# EAGLE board T32 ref (EAGLE 9.6.2)

Size 160 x 100 mm. Coordinates in mm from the lower left corner, seen from the top.
Outline: 0,0 160,0 160,100 0,100 0,0
Copper layers (1*16): Top 0.035mm / dielectric 1.5mm / Bottom 0.035mm
Design rules "default": minimum track width 6mil, minimum drill 0.35mm, track to track 6mil, track to pad 6mil, pad to pad 6mil, via to via 6mil, smd to smd 6mil, copper to edge 40mil, drill to drill 6mil, minimum pad ring 10mil, minimum via ring 8mil, stop-mask expansion 4mil, vias tented up to drill 0mil, thermal gap 10mil

## Footprints (pad centres in the part's own frame; a part is rotated, then mirrored left to right if it is on the bottom)
1X02 = drill 1.016 pad 1.88: 1 0,0; 2 2.54,0
1206 = smd 1.6 x 1.8: 1 -1.4,0; 2 1.4,0
BAT_3000 = smd 3.96 x 3.96: N 0,0.69 | smd 3.18 x 3.18: P 7.87,0.69; P1 -7.87,0.69
0603 = smd 1.1 x 1: 1 -0.85,0; 2 0.85,0
C0805 = smd 1.397 x 1.016: 1 0,1.016; 2 0,-1.016
C0603 = smd 0.889 x 0.889: 1 0,0.762; 2 0,-0.762
0402 = smd 0.85 x 0.9: 1 -0.58,0; 2 0.58,0
0805 = smd 1.3 x 1.5: 1 -0.95,0; 2 0.95,0
1210 = smd 1.27 x 2.06: 1 -1.755,0; 2 1.755,0
TE_1-2295018-2 = smd 0.3 x 0.8: A1 -2.75,4.63; A2 -2.25,4.63; A3 -1.75,4.63; A4 -1.25,4.63; A5 -0.75,4.63; A6 -0.25,4.63; A7 0.25,4.63; A8 0.75,4.63; A9 1.25,4.63; A10 1.75,4.63; A11 2.25,4.63; A12 2.75,4.63; B1 3,3.43; B2 2.5,3.43; B3 2,3.43; B4 1.5,3.43; B5 1,3.43; B6 0.5,3.43; B7 -0.5,3.43; B8 -1,3.43; B9 -1.5,3.43; B10 -2,3.43; B11 -2.5,3.43; B12 -3,3.43 | drill 0.5 pad 1.1 long: S1 -5.97,0; S2 5.97,0 | drill 0.5 pad 1.1: S3 -4.55,4.22; S4 4.55,4.22
1X07 = drill 1.016 pad 1.88: 1 0,0; 2 2.54,0; 3 5.08,0; 4 7.62,0; 5 10.16,0; 6 12.7,0; 7 15.24,0
LQFP64-05 = smd 1.2 x 0.25: 1 -5.915,3.759; 2 -5.915,3.251; 3 -5.915,2.743; 4 -5.915,2.261; 5 -5.915,1.753; 6 -5.915,1.245; 7 -5.915,0.762; 8 -5.915,0.254; 9 -5.915,-0.254; 10 -5.915,-0.762; 11 -5.915,-1.245; 12 -5.915,-1.753; 13 -5.915,-2.261; 14 -5.915,-2.743; 15 -5.915,-3.251; 16 -5.915,-3.759; 33 5.915,-3.759; 34 5.915,-3.251; 35 5.915,-2.743; 36 5.915,-2.261; 37 5.915,-1.753; 38 5.915,-1.245; 39 5.915,-0.762; 40 5.915,-0.254; 41 5.915,0.254; 42 5.915,0.762; 43 5.915,1.245; 44 5.915,1.753; 45 5.915,2.261; 46 5.915,2.743; 47 5.915,3.251; 48 5.915,3.759 | smd 0.25 x 1.2: 17 -3.759,-5.915; 18 -3.251,-5.915; 19 -2.743,-5.915; 20 -2.261,-5.915; 21 -1.753,-5.915; 22 -1.245,-5.915; 23 -0.762,-5.915; 24 -0.254,-5.915; 25 0.254,-5.915; 26 0.762,-5.915; 27 1.245,-5.915; 28 1.753,-5.915; 29 2.261,-5.915; 30 2.743,-5.915; 31 3.251,-5.915; 32 3.759,-5.915; 49 3.759,5.915; 50 3.251,5.915; 51 2.743,5.915; 52 2.261,5.915; 53 1.753,5.915; 54 1.245,5.915; 55 0.762,5.915; 56 0.254,5.915; 57 -0.254,5.915; 58 -0.762,5.915; 59 -1.245,5.915; 60 -1.753,5.915; 61 -2.261,5.915; 62 -2.743,5.915; 63 -3.251,5.915; 64 -3.759,5.915
INDC1608X95N = smd 0.9 x 0.97: 1 -0.785,0; 2 0.785,0
1X04 = drill 1.016 pad 1.88: 1 0,0; 2 2.54,0; 3 5.08,0; 4 7.62,0
1X03 = drill 1.016 pad 1.88: 1 0,0; 2 2.54,0; 3 5.08,0
LED-0805 = smd 0.889 x 1.27: + -0.889,0; - 0.889,0
F0805 = smd 1.397 x 1.016: 1 0,0.889; 2 0,-0.889
L0603 = smd 0.889 x 0.889: 1 -0.762,0; 2 0.762,0
R0603 = smd 0.889 x 0.889: 1 0,0.762; 2 0,-0.762
SOT-23 = smd 1.016 x 1.143: 1 -0.889,-1.016; 2 0.889,-1.016; 3 0,1.016
R0402 = smd 0.5 x 0.5: 1 0,0.463; 2 0,-0.463
MICROBUILDER_LGA8_8X6 = smd 1.2 x 0.6: 1 -3.8,1.905; 2 -3.8,0.635; 3 -3.8,-0.635; 4 -3.8,-1.905; 5 3.8,-1.905; 6 3.8,-0.635; 7 3.8,0.635; 8 3.8,1.905
SDE06A_TEX-M = smd 0.914 x 0.356: 1 -1.499,0.95; 2 -1.499,0; 3 -1.499,-0.95; 4 1.499,-0.95; 5 1.499,0; 6 1.499,0.95 | smd 1.6 x 2.1: 7 0,0
MICROBUILDER_BNO080 = smd 0.25 x 0.675: 1 -2.25,1.562; 6 -2.25,-1.562; 7 -1.75,-1.562; 8 -1.25,-1.562; 9 -0.75,-1.562; 10 -0.25,-1.562; 11 0.25,-1.562; 12 0.75,-1.562; 13 1.25,-1.562; 14 1.75,-1.562; 15 2.25,-1.562; 20 2.25,1.562; 21 1.75,1.562; 22 1.25,1.562; 23 0.75,1.562; 24 0.25,1.562; 25 -0.25,1.562; 26 -0.75,1.562; 27 -1.25,1.562; 28 -1.75,1.562 | smd 0.575 x 0.25: 2 -2.312,0.75; 3 -2.312,0.25; 4 -2.312,-0.25; 5 -2.312,-0.75; 16 2.312,-0.75; 17 2.312,-0.25; 18 2.312,0.25; 19 2.312,0.75
SOIC127P599X175-8N = smd 1.97 x 0.6: 1 -2.47,1.905; 2 -2.47,0.635; 3 -2.47,-0.635; 4 -2.47,-1.905; 5 2.47,-1.905; 6 2.47,-0.635; 7 2.47,0.635; 8 2.47,1.905
WSON8-6X5MM = smd 0.5 x 1.4: 1 -1.905,-3; 2 -0.635,-3; 3 0.635,-3; 4 1.905,-3; 5 1.905,3; 6 0.635,3; 7 -0.635,3; 8 -1.905,3 | smd 4.3 x 3.4: EP 0,0
QFN50P300X300X65-17N = smd 0.65 x 0.3: 1 -1.55,0.75; 2 -1.55,0.25; 3 -1.55,-0.25; 4 -1.55,-0.75; 9 1.55,-0.75; 10 1.55,-0.25; 11 1.55,0.25; 12 1.55,0.75 | smd 0.3 x 0.65: 5 -0.75,-1.55; 6 -0.25,-1.55; 7 0.25,-1.55; 8 0.75,-1.55; 13 0.75,1.55; 14 0.25,1.55; 15 -0.25,1.55; 16 -0.75,1.55 | smd 2 x 2: 17 0,0
21-0136I_T1633-5_MXM-M = smd 0.906 x 0.249: 1 -1.503,0.75; 2 -1.503,0.25; 3 -1.503,-0.25; 4 -1.503,-0.75; 9 1.503,-0.75; 10 1.503,-0.25; 11 1.503,0.25; 12 1.503,0.75 | smd 0.249 x 0.906: 5 -0.75,-1.503; 6 -0.25,-1.503; 7 0.25,-1.503; 8 0.75,-1.503; 13 0.75,1.503; 14 0.25,1.503; 15 -0.25,1.503; 16 -0.75,1.503 | smd 1.25 x 1.25: 17 0,0
MICROBUILDER_QFN24_3MM = smd 0.55 x 0.2: 1 -1.5,1; 2 -1.5,0.6; 3 -1.5,0.2; 4 -1.5,-0.2; 5 -1.5,-0.6; 6 -1.5,-1; 13 1.5,-1; 14 1.5,-0.6; 15 1.5,-0.2; 16 1.5,0.2; 17 1.5,0.6; 18 1.5,1 | smd 0.2 x 0.55: 7 -1,-1.5; 8 -0.6,-1.5; 9 -0.2,-1.5; 10 0.2,-1.5; 11 0.6,-1.5; 12 1,-1.5; 19 1,1.5; 20 0.6,1.5; 21 0.2,1.5; 22 -0.2,1.5; 23 -0.6,1.5; 24 -1,1.5 | smd 1.54 x 1.54: THERMAL 0,0
MICROBUILDER_BMP388 = smd 0.25 x 0.275: 1 0.25,0.75; 2 -0.25,0.75; 6 -0.25,-0.75; 7 0.25,-0.75 | smd 0.275 x 0.25: 3 -0.762,0.5; 4 -0.762,0; 5 -0.762,-0.5; 8 0.762,-0.5; 9 0.762,0; 10 0.762,0.5
CRYSTAL-SMD-3.2X1.5MM = smd 1 x 1.8: P$1 -1.25,0; P$2 1.25,0
X2-SMD-5.0X3.2X1.3MM = smd 1.778 x 2.032: 1 -2.159,0; 2 2.159,0

## Placement (x,y rotation side)
2_CELL_LIPO_BATTERY  [1X02]  -60.96,46.99 0 top  (outside the outline)
120  [1206]  -21.59,43.18 0 top  (outside the outline)
BT1  CR1216  [BAT_3000]  -24.13,8.89 0 top  (outside the outline)
C1  0.1uF  [0603]  -64.77,57.15 0 top  (outside the outline)
C2  2.2uF  [0603]  -6.35,49.53 0 top  (outside the outline)
C3  2.2uF  [C0805]  -15.24,36.83 0 top  (outside the outline)
C4  0.1uF  [C0603]  -25.4,57.15 0 top  (outside the outline)
C5  0.1uF  [C0603]  -30.48,57.15 0 top  (outside the outline)
C6  2.2uF  [C0805]  -21.59,36.83 0 top  (outside the outline)
C7  0.1uF  [C0603]  -35.56,57.15 0 top  (outside the outline)
C8  0.1uF  [C0603]  -40.64,57.15 0 top  (outside the outline)
C9  0.1uF  [C0603]  -45.72,57.15 0 top  (outside the outline)
C10  22pF  [C0603]  -50.8,57.15 0 top  (outside the outline)
C11  22pF  [C0603]  -55.88,57.15 0 top  (outside the outline)
C12  0.1uF  [C0603]  -60.96,57.15 0 top  (outside the outline)
C13  0.1uF  [0402]  -26.67,64.77 0 top  (outside the outline)
C14  0.1uF  [0402]  -30.48,64.77 0 top  (outside the outline)
C15  22pF  [0603]  -19.05,60.96 0 top  (outside the outline)
C16  22pF  [0603]  -22.86,60.96 0 top  (outside the outline)
C17  0.1uF  [0402]  -34.29,64.77 0 top  (outside the outline)
C18  47uF  [0805]  -60.96,64.77 0 top  (outside the outline)
C19  0.1uF  [0603]  -26.67,60.96 0 top  (outside the outline)
C20  0.1uF  [0603]  -30.48,60.96 0 top  (outside the outline)
C21  0.1uF  [0603]  -34.29,60.96 0 top  (outside the outline)
C22  0.1uF  [0603]  -38.1,60.96 0 top  (outside the outline)
C23  0.1uF  [0603]  -41.91,60.96 0 top  (outside the outline)
C24  0.1uF  [0603]  -45.72,60.96 0 top  (outside the outline)
C25  0.1uF  [0603]  -49.53,60.96 0 top  (outside the outline)
C26  0.1uF  [0603]  -53.34,60.96 0 top  (outside the outline)
C27  22UF-1210-16V-20%  [1210]  -38.1,30.48 0 top  (outside the outline)
C28  22UF-1210-16V-20%  [1210]  -48.26,30.48 0 top  (outside the outline)
C29  2.2uF  [0603]  -57.15,60.96 0 top  (outside the outline)
C30  2.2uF  [0603]  -60.96,60.96 0 top  (outside the outline)
C31  2.2uF  [0603]  -64.77,60.96 0 top  (outside the outline)
J2  1-2295018-2  [TE_1-2295018-2]  38.1,8.89 0 top
J3  [1X07]  -39.37,46.99 0 top  (outside the outline)
K1  MK20DX256VLH7  [LQFP64-05]  40.64,39.37 0 top
L1  MLF1608E6R8KTD25  [INDC1608X95N]  -63.5,30.48 0 top  (outside the outline)
NRF24L01_A  [1X04]  -50.8,46.99 0 top  (outside the outline)
NRF24L01_B  [1X03]  11.43,62.23 0 top
P1  [LED-0805]  -60.96,52.07 0 top  (outside the outline)
R1  FUSE  [F0805]  -15.24,43.18 0 top  (outside the outline)
R2  [L0603]  -38.1,64.77 0 top  (outside the outline)
R3  470R  [R0603]  -26.67,43.18 0 top  (outside the outline)
R4  [L0603]  -43.18,64.77 0 top  (outside the outline)
R5  33R  [R0603]  -31.75,43.18 0 top  (outside the outline)
R6  33R  [R0603]  -36.83,43.18 0 top  (outside the outline)
R7  [SOT-23]  -30.48,30.48 0 top  (outside the outline)
R8  470R  [R0603]  -41.91,43.18 0 top  (outside the outline)
R9  4.7k  [0603]  -15.24,64.77 0 top  (outside the outline)
R10  4.7k  [0603]  -19.05,64.77 0 top  (outside the outline)
R11  4.7K  [R0402]  -15.24,57.15 0 top  (outside the outline)
R12  4.7K  [R0402]  -20.32,57.15 0 top  (outside the outline)
R13  10k  [0603]  48.26,29.21 0 top
R14  1.5K  [R0603]  -46.99,43.18 0 top  (outside the outline)
R15  1.5K  [R0603]  -52.07,43.18 0 top  (outside the outline)
SPI_SD_CARD  [MICROBUILDER_LGA8_8X6]  -55.88,21.59 0 top  (outside the outline)
U1  LP38691QSD-3.3/NOPBSDE06A_TEX-M  [SDE06A_TEX-M]  -54.61,52.07 0 top  (outside the outline)
U2  [MICROBUILDER_BNO080]  -24.13,30.48 0 top  (outside the outline)
U3  SN65HVD230  [SOIC127P599X175-8N]  43.18,24.13 0 top
U4  W25Q32FV  [WSON8-6X5MM]  -45.72,21.59 0 top  (outside the outline)
U5  MKL02Z32VFG4  [QFN50P300X300X65-17N]  -39.37,22.86 0 top  (outside the outline)
U6  MAX17632AATE+T21-0136I_T1633-5_MXM-M  [21-0136I_T1633-5_MXM-M]  -62.23,38.1 0 top  (outside the outline)
U$2  MICROBUILDER_ICM-20649QFN3MM  [MICROBUILDER_QFN24_3MM]  38.1,66.04 0 top
U$3  MICROBUILDER_BMP388  [MICROBUILDER_BMP388]  13.97,73.66 0 top
U$8  10K  [R0402]  -48.26,64.77 0 top  (outside the outline)
U$9  10K  [R0402]  -53.34,64.77 0 top  (outside the outline)
U$10  10K  [R0402]  34.29,60.96 0 top
Y1  32.768kHz  [CRYSTAL-SMD-3.2X1.5MM]  -15.24,48.26 0 top  (outside the outline)
Y2  32.768kHz  [CRYSTAL-SMD-3.2X1.5MM]  -20.32,48.26 0 top  (outside the outline)
Y3  16MHZ  [X2-SMD-5.0X3.2X1.3MM]  -16.51,31.75 0 top  (outside the outline)

## Library data of the parts
2_CELL_LIPO_BATTERY J3 NRF24L01_B = SparkFun-Connectors
120 = SparkFun-Resistors
BT1 = Battery_Holder; CATEGORY: Battery-Holder; CELL_DIAMETER: 12mm; DESCRIPTION: Battery Retainer Coin, 12.0mm 1 Cell SMD (SMT) Tab; MANUFACTURER: Keystone Electronics; MPN: 3000; PART_STATUS: ACTIVE; ROHS_COMPLIANT: COMPLIANT; SERIES: -; SUB_CATEGORY: Holder; TYPE: Coin Cell
C1 C26 = SparkFun-Capacitors; PROD_ID: CAP-00810
C2 C29-C31 = SparkFun-Capacitors; PROD_ID: CAP-07888
C3 C6 = t32_ref; DESC: 2.2uF / 25 VDC / X7R; MF: Taiyo Yuden; MPN: TMK212B7225KG-TR; OC_MOUSER: 963-TMK212B7225KG-TR; PACKAGE: 0805; TYPE: Capacitor
C4 C5 C7-C9 C12 = t32_ref; DESC: 0.1uF / 16VDC / X7R; MF: Murata Electronics; MPN: GRM188R71C104KA01D; OC_MOUSER: 81-GRM39X104K16; PACKAGE: 0603; TYPE: Capacitor
C10 C11 = t32_ref; DESC: 22pF / 50VDC / C0G (NP0); MF: Vishay / Vitramon; MPN: VJ0603A220JXACW1BC; OC_MOUSER: 77-VJ0603A220JXACBC; PACKAGE: 0603; TYPE: Capacitor
C13 C14 C17 = SparkFun-Capacitors; PROD_ID: CAP-12416
C15 C16 = SparkFun-Capacitors; PROD_ID: CAP-07876
C18 = microbuilder
C19-C25 = SparkFun-Capacitors; PROD_ID: CAP-08390
C27 C28 = SparkFun-Capacitors
J2 = 1-2295018-2; AVAILABILITY: In Stock; DESCRIPTION: USB-C (USB TYPE-C) USB 3.2 Gen 2 (USB 3.1 Gen 2, Superspeed + (USB 3.1)) Receptacle Connector 24 Position Board Cutout, Surface Mount, Right Angle; Through Hole; MF: TE Connectivity AMP Connectors; MP: 1-2295018-2; PACKAGE: None; PRICE: None; PURCHASE-URL: https://pricing.snapeda.com/search/part/1-2295018-2/?ref=eda
K1 = t32_ref; DESC: MK20DX256VLH7; MF: NXP; MPN: MK20DX256VLH7; OC_MOUSER: 841-MK20DX256VLH7; PACKAGE: LQFP-64; TYPE: Microcontroller
L1 = MLF1608E6R8KTD25; AVAILABILITY: In Stock; DESCRIPTION: Fixed Ind 6.8uh 15ma 1.3 Ohm Smd; MF: TDK; MP: MLF1608E6R8KTD25; PACKAGE: 0603 TDK; PRICE: None; PURCHASE-URL: https://pricing.snapeda.com/search/part/MLF1608E6R8KTD25/?ref=eda
NRF24L01_A = SparkFun-Connectors; PROD_ID: CONN-09696
P1 = t32_ref; DESC: orange; MF: ROHM Semiconductor; MPN: SML-211DTT86; OC_MOUSER: 755-SML-211DTT86; PACKAGE: 0805; TYPE: LED
R1 = t32_ref; DESC: 6V / 0.5A; MF: Bel Fuse; MPN: 0ZCK0050FF2E; OC_MOUSER: 530-0ZCK0050FF2E; PACKAGE: 0805; TYPE: PPTC
R2 R4 = t32_ref; DESC: 600R / 100MHz; MF: Murata Electronics; MPN: BLM18AG601SN1D; OC_MOUSER: 81-BLM11A601S; PACKAGE: 0603; TYPE: Ferrite
R3 R8 = t32_ref; DESC: 470R / 1 % / 0.1 W; MF: Vishay; MPN: CRCW0603470RFKEA; OC_MOUSER: 71-CRCW0603-470-E3; PACKAGE: 0603; TYPE: Resistor
R5 R6 = t32_ref; DESC: 33R / 1% / 0.25 W; MF: Panasonic; MPN: ERJ-PA3F33R0V; OC_MOUSER: 667-ERJ-PA3F33R0V; PACKAGE: 0603; TYPE: Resistor
R7 = t32_ref; DESC: Dual Schottky, common cat; MF: NXP Semiconductors; MPN: BAT54C,215; OC_MOUSER: 771-BAT54C-T/R; PACKAGE: SOT-23; TYPE: Diode
R9 R10 = SparkFun-Resistors; PROD_ID: RES-07857
R11 R12 = OPL_Resistor; MPN: RC0402JR-074K7L
R13 = SparkFun-Resistors; PROD_ID: RES-00824
R14 R15 = OPL_Resistor; MPN: RC0603FR-071K5L
SPI_SD_CARD = Adafruit SPI Flash SD Card
U1 = BLTFootprints; COPYRIGHT: Copyright (C) 2021 Ultra Librarian. All rights reserved.; MANUFACTURER_PART_NUMBER: LP38691QSD-3.3/NOPB; MFR_NAME: Texas Instruments
U2 = Adafruit_BNO08x
U3 = SN65HVD230; AVAILABILITY: In Stock; DESCRIPTION: 1/1 Transceiver Half CANbus 8-SOIC; MF: Texas Instruments; MP: SN65HVD230; PACKAGE: SOIC-8 Texas Instruments; PRICE: None; PURCHASE-URL: https://pricing.snapeda.com/search/part/SN65HVD230/?ref=eda
U4 = SparkFun-IC-Memory; PROD_ID: NA-XXXXX
U5 = MKL02Z32VFG4; AVAILABILITY: In Stock; DESCRIPTION: MCU 32-bit ARM Cortex M0+ RISC 32KB Flash 3.3V Automotive 16-Pin QFN EP Tray; MF: NXP Semiconductors; MP: MKL02Z32VFG4; PACKAGE: QFN-16 NXP USA; PRICE: None; PURCHASE-URL: https://pricing.snapeda.com/search/part/MKL02Z32VFG4/?ref=eda
U6 = BLTFootprints; COPYRIGHT: Copyright (C) 2021 Ultra Librarian. All rights reserved.; MANUFACTURER_PART_NUMBER: MAX17632AATE+T; MFR_NAME: Maxim Integrated Products
U$2 = Adaruit ICM20649
U$3 = Adafruit BMP390
U$8-U$10 = OPL_Resistor; MPN: RC0402JR-0710KL
Y1 Y2 = SparkFun-Clocks; PROD_ID: XTAL-13062
Y3 = OPL_Crystal Oscillator; MPN: X053201602002

## Nets
3.3V: C2.1 C4.1 C5.1 C12.1 C13.1 C18.1 C19.1 C20.1 C21.1 C22.1 C23.1 C24.1 C25.1 C27.1 C28.1 J3.1 K1.3 K1.7 K1.30 K1.48 L1.2 NRF24L01_B.3 R2.1 R7.1 R9.2 R10.2 R11.1 R12.1 SPI_SD_CARD.8 U1.4 U1.5 U2.3 U2.28 U3.3 U4.8 U5.1 U6.6 U$2.8 U$2.13 U$3.1 U$3.10 U$8.1 U$9.1 U$10.1
5V: C1.1 C31.1 R1.2 U1.1 U1.6
A0: K1.58
A1: K1.43
A2: K1.35
A3: K1.36
A6: K1.62
A7: K1.63
A8: K1.44
A9: K1.45
A10+: K1.9
A11+: K1.10
A12: K1.11
A13: K1.12
A14: K1.18
AGND: C6.2 C7.2 C8.2 K1.15 K1.16 R4.2
AREF+: C7.1 K1.14 R3.2
BAT+: 2_CELL_LIPO_BATTERY.2 C30.1 U6.1 U6.2 U6.15 U6.16
BMPINT: U$3.7
BNO_SCL_OUT: R12.2 U2.15
BNO_SDA_OUT: R11.2 U2.16
BNO_XIN32: C15.1 U2.27 Y1.P$1
BNO_XOUT32: C16.1 U2.26 Y1.P$2
BUCK_3.3V_BST: C26.1 U6.10
BUCK_3.3V_LX: C26.2 L1.1 U6.11 U6.12
BUCK_3.3V_VCC: C29.1
CANH: 120.2 U3.7
CANL: 120.1 U3.6
CANRX: K1.29 U3.4
CANTX: K1.28 U3.1
CE: NRF24L01_A.2
CS1: K1.49 SPI_SD_CARD.2
CS2: K1.46 U$3.6
CS3: K1.60 U$2.22
CS4: K1.59 NRF24L01_B.2
CS5: K1.61 U4.1
EN': J3.4 U5.3
EXP: U5.17
EXTAL32: K1.20 Y2.P$1
GND: 2_CELL_LIPO_BATTERY.1 BT1.N C1.2 C2.2 C3.2 C4.2 C5.2 C9.2 C10.2 C11.2 C12.2 C13.2 C14.2 C15.2 C16.2 C17.1 C18.2 C19.2 C20.2 C21.2 C22.2 C23.2 C24.2 C25.2 C27.2 C28.2 C29.2 C30.2 C31.2 J2.A1 J2.A12 J2.B1 J2.B12 J2.S1 J2.S2 J2.S3 J2.S4 J3.2 K1.4 K1.31 K1.47 NRF24L01_A.1 R4.1 R8.1 R13.1 R14.1 R15.2 SPI_SD_CARD.4 U1.2 U2.2 U2.5 U2.6 U2.10 U2.17 U2.25 U3.2 U4.4 U5.2 U6.3 U6.4 U6.9 U6.13 U6.14 U$2.11 U$2.18 U$2.20 U$2.THERMAL U$3.3 U$3.8 U$3.9
ICMINT1: U$2.12
ICMINT2: U$2.19
MCU_0: K1.39
MCU_1: K1.40
MCU_2: K1.57
MCU_5: K1.64
MCU_24: K1.27
MCU_25: K1.42
MCU_26: K1.2
MCU_27: K1.54
MCU_28: K1.53
MCU_29: K1.55
MCU_30: K1.56
MCU_31: K1.1
MCU_32: K1.41
MCU_33: K1.26
MCU_BATIN: C9.1 K1.21 R7.3
MISO: K1.52 NRF24L01_A.4 SPI_SD_CARD.6 U4.2 U$2.9 U$3.5
MOSI: K1.51 NRF24L01_B.1 SPI_SD_CARD.5 U4.5 U$2.24 U$3.4
N$1: J2.A5 R14.2
N$2: J2.B5 R15.1
N$4: C14.1 U2.9
N$10: K1.5 R6.2
N$14: K1.6 R5.2
N$52: P1.- R8.2
N$62: C17.2 U$2.10
N$66: U2.18 U$10.2
N$73: U2.14 U$8.2
N$74: U2.4 U$9.2
PROG: J3.3 U5.10
PTA2: K1.24 U5.9
PTA18: C10.1 K1.32 Y3.2
PTA19: C11.1 K1.33 Y3.1
RESET: J3.7 K1.34 U5.4 U5.5
SCK: K1.50 NRF24L01_A.3 P1.+ SPI_SD_CARD.3 U4.6 U$2.23 U$3.2
SCL: K1.37 R9.1 U2.19
SDA: K1.38 R10.1 U2.20
SN65RS: R13.2 U3.8
SWC: J3.5 K1.22 U5.8
SWD: J3.6 K1.25 U5.7
USB_D+: J2.A6 J2.B7 R6.1
USB_D-: J2.A7 J2.B6 R5.1
USB_ID: K1.23 U5.6
VBAT: BT1.P BT1.P1 R7.2
VDDA: C6.1 K1.13 R2.2 R3.1
VREF_OUT: C8.1 K1.17
VUSB: C3.1 J2.A4 J2.A9 J2.B4 J2.B9 R1.1
XTAL32: K1.19 Y2.P$2

## Tracks (layer width: path | path; a pad name or v marks a point on that pad's centre or on a via)
3.3V  (43 unrouted)
5V  (4 unrouted)
AGND  (5 unrouted)
AREF+  (2 unrouted)
BAT+  (5 unrouted)
BNO_SCL_OUT  (1 unrouted)
BNO_SDA_OUT  (1 unrouted)
BNO_XIN32  (2 unrouted)
BNO_XOUT32  (2 unrouted)
BUCK_3.3V_BST  (1 unrouted)
BUCK_3.3V_LX  (3 unrouted)
CANH  (1 unrouted)
CANL  (1 unrouted)
CANRX  (1 unrouted)
CANTX  (1 unrouted)
CS1  (1 unrouted)
CS2  (1 unrouted)
CS3  (1 unrouted)
CS4  (1 unrouted)
CS5  (1 unrouted)
EN'  (1 unrouted)
EXTAL32  (1 unrouted)
GND  (69 unrouted)
MCU_BATIN  (2 unrouted)
MISO  (5 unrouted)
MOSI  (5 unrouted)
N$1  (1 unrouted)
N$2  (1 unrouted)
N$4  (1 unrouted)
N$10  (1 unrouted)
N$14  (1 unrouted)
N$52  (1 unrouted)
N$62  (1 unrouted)
N$66  (1 unrouted)
N$73  (1 unrouted)
N$74  (1 unrouted)
PROG  (1 unrouted)
PTA2  (1 unrouted)
PTA18  (2 unrouted)
PTA19  (2 unrouted)
RESET  (3 unrouted)
SCK  (6 unrouted)
SCL  (2 unrouted)
SDA  (2 unrouted)
SN65RS  (1 unrouted)
SWC  (2 unrouted)
SWD  (2 unrouted)
USB_D+  (2 unrouted)
USB_D-  (2 unrouted)
USB_ID  (1 unrouted)
VBAT  (2 unrouted)
VDDA  (3 unrouted)
VREF_OUT  (1 unrouted)
VUSB  (5 unrouted)
XTAL32  (1 unrouted)